# Altium PCB PCB1.PcbDoc
Units mm, origin at the board's own origin, x right, y up, seen from the top; angles counter-clockwise.
Board outline 40 x 40 mm, 2 copper layers (Top Layer, Bottom Layer); 11 components, 7 nets, 23 pads, 0 vias.
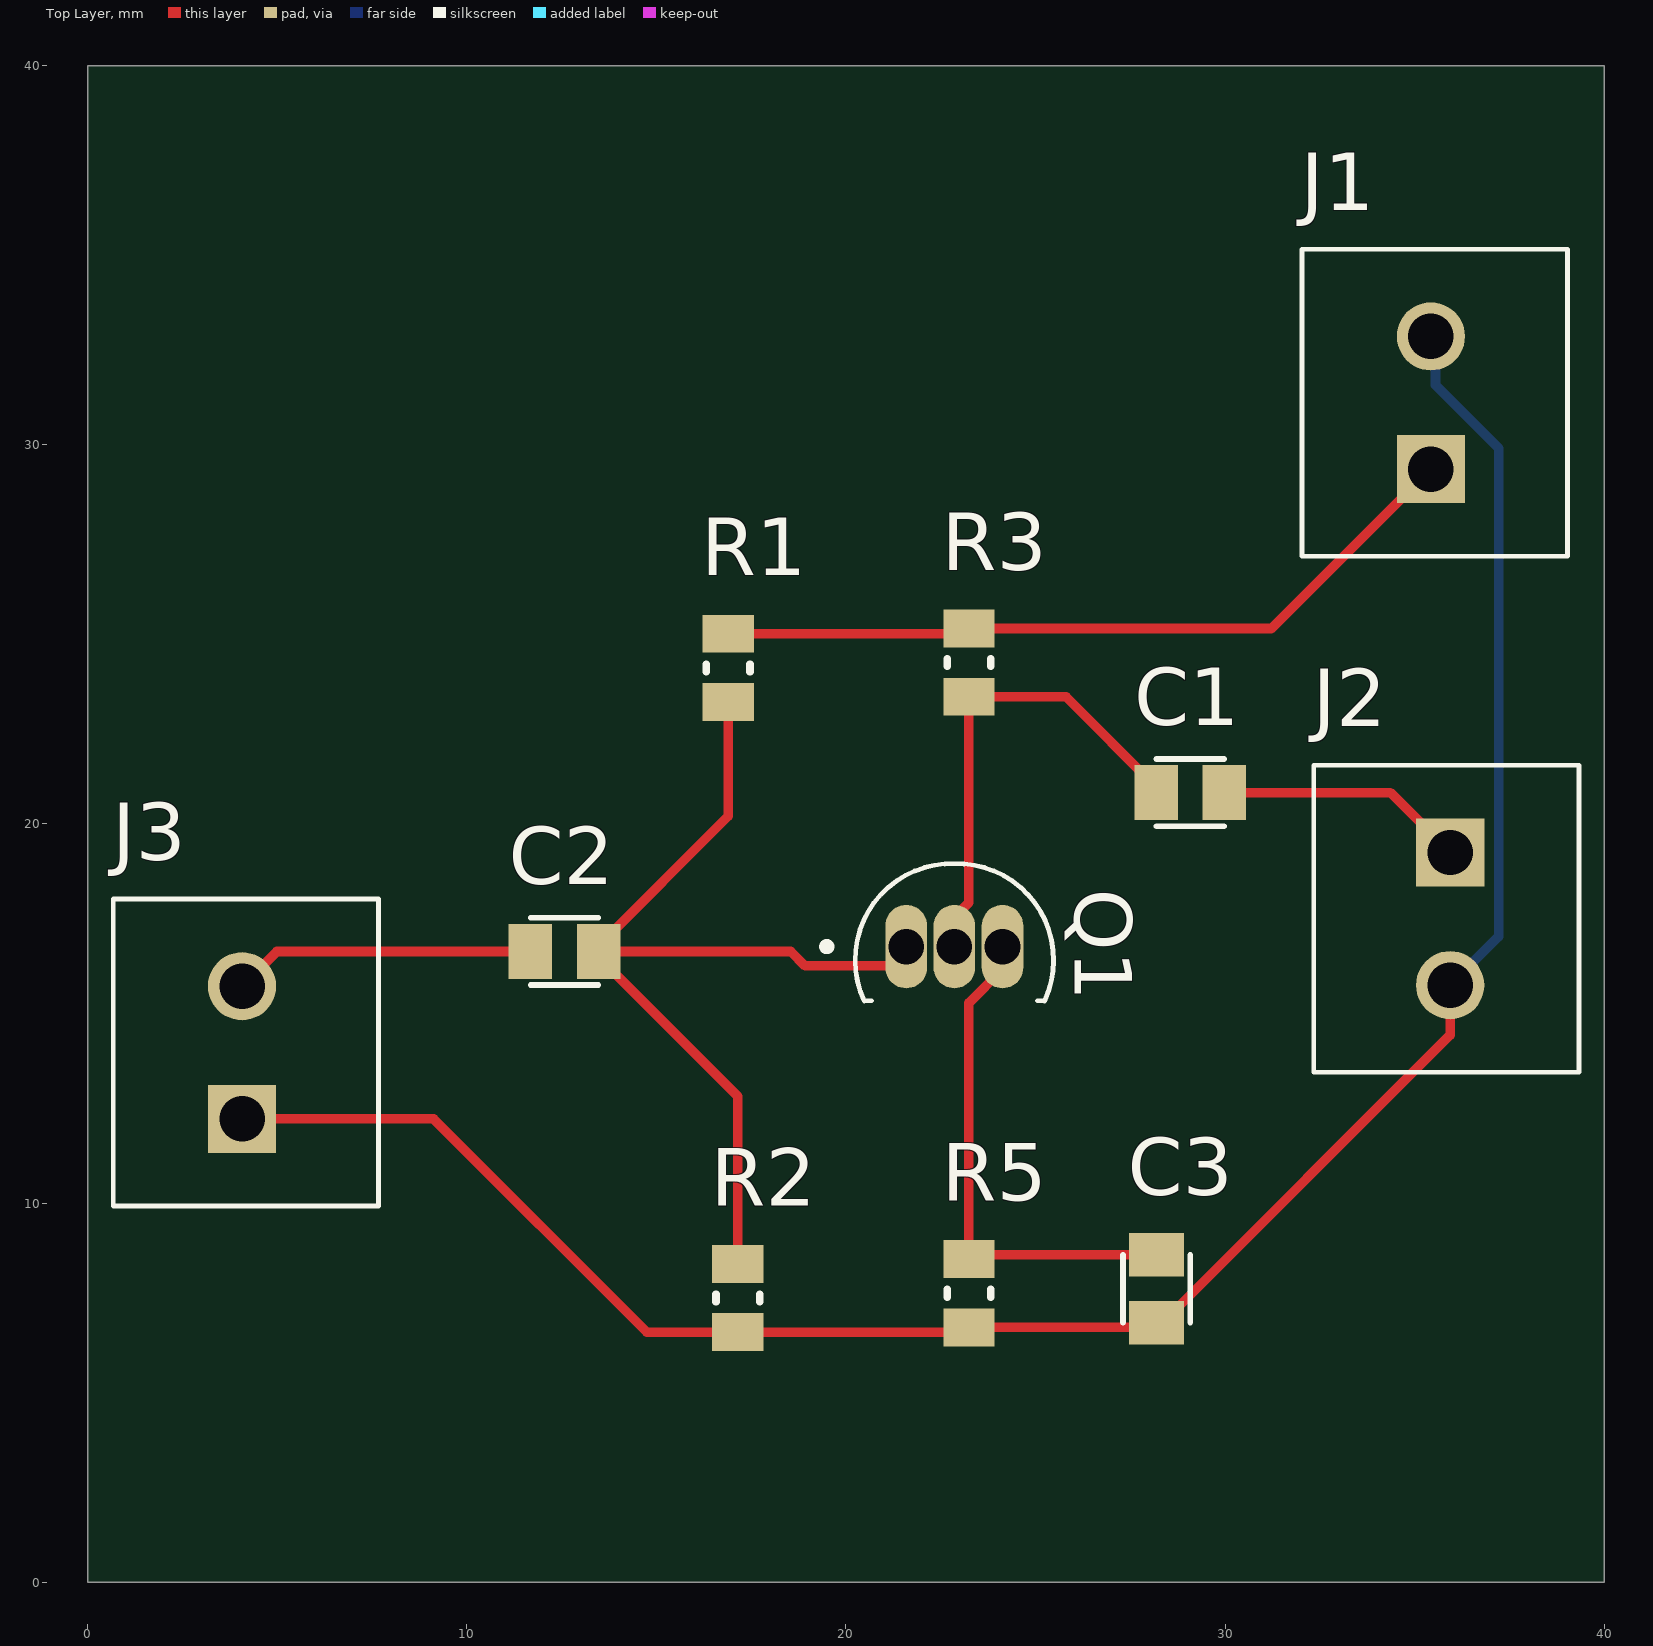
[diagram p0: Top Layer view]
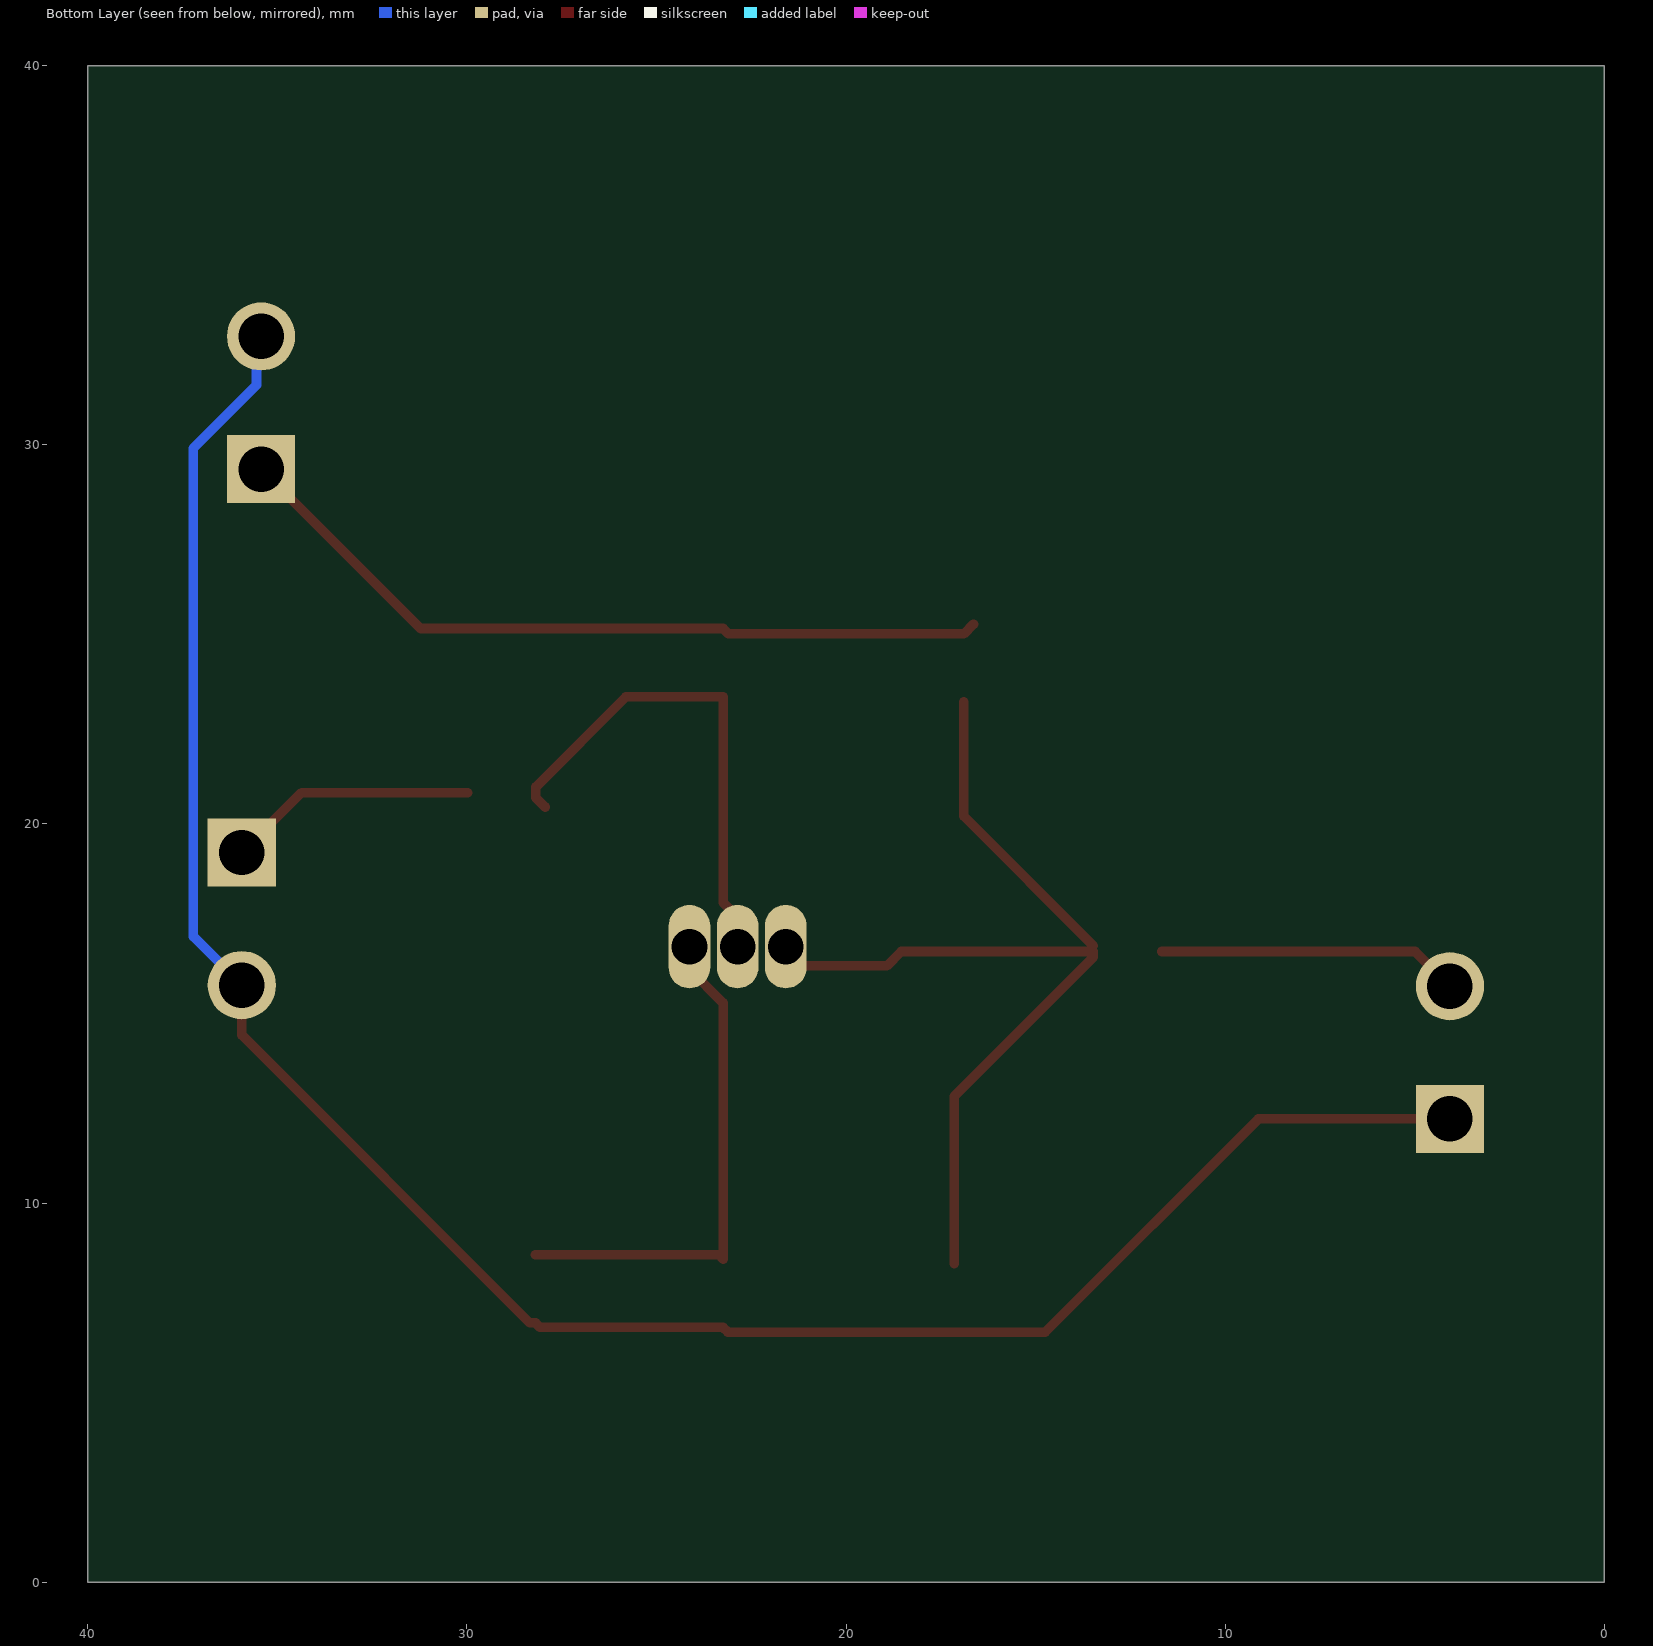
[diagram p1: Bottom Layer view, seen from below]
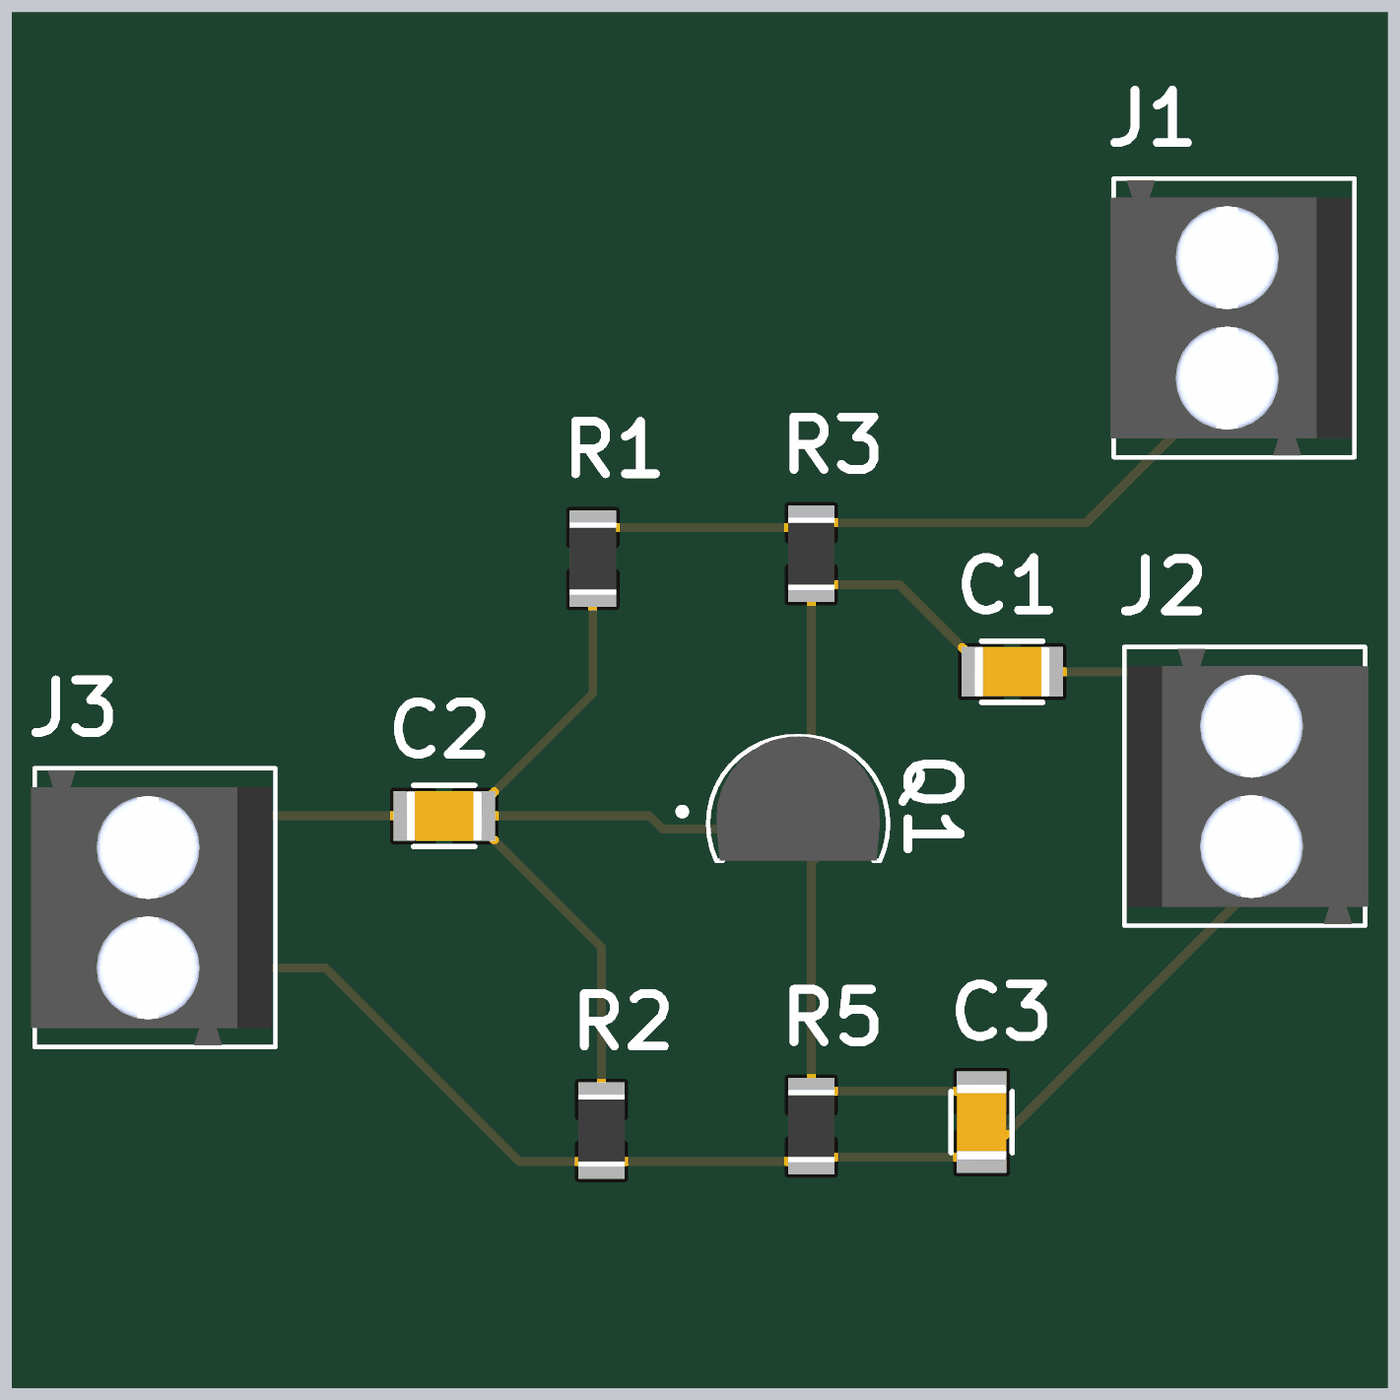
[diagram p2: 3D render of the assembled board from above, using the file's embedded part models]

## Layer stack, top to bottom
Top Solder: solder mask 0.0102, Solder Resist, Dk 3.5
Top Layer: signal copper 0.0356
Dielectric 1: dielectric 0.32, FR-4, Dk 4.8
Bottom Layer: signal copper 0.0356
Bottom Solder: solder mask 0.0102, Solder Resist, Dk 3.5

## Board outline
0,0 0,40 40,40 40,0

## Design rules (kind name [scope] priority, off if disabled: settings)
Clearance [All] p1: gap=0.254 ignorepadtopadclearanceinfootprint=FALSE
PolygonConnect [All] p1: connectstyle=Relief reliefconductorwidth=0.254 reliefentries=4 polygonreliefangle="90 Angle" airgapwidth=0.254
RoutingVias [All] p1: holewidth=0.711 width=1.27 viastyle="Through Hole" minholewidth=0.711 minwidth=1.27 maxholewidth=0.711 maxwidth=1.27
SolderMaskExpansion [All] p1: expansion=0.102 istentingtop=FALSE
SupplyNets "Schematic Supply Nets_1" [InNet('GND')] p1: voltage=0.000
SupplyNets "Schematic Supply Nets" [InNet('12V')] p2: voltage=0.000
Width [All] p1: maxlimit=0.254 minlimit=0.254 preferedwidth=0.254
30 further rules are at their usual default settings.

## Components (designator, comment, footprint, x,y, rotation, side; value= is the part's Value field where it differs from the comment)
C1 "C0805C105K9RACTU" C0805C105K9RACTU 29.083,20.828 r0 top value=1uF
C2 "C0805C105K9RACTU" C0805C105K9RACTU 12.573,16.637 r180 top value=1uF
C3 "C0805C105K9RACTU" C0805C105K9RACTU 28.194,7.736 r90 top value=1uF
J1 "OSTTE020104" OST_OSTTE020104 35.433,31.115 r90 top
J2 "OSTTE020104" OST_OSTTE020104 35.941,17.498 r270 top
J3 "OSTTE020104" OST_OSTTE020104 4.064,13.97 r90 top
Q1 "BC547BBU" "TO92127P476H533-3 - duplicate" 22.86,17.144 r0 top
R1 "RC0805FR-0721KL" RC0805FR-0721KL 16.891,24.119 r90 top value=21kR
R2 "RC0805FR-075K6L" RC0805FR-075K6L 17.145,7.493 r90 top value=5.6kR
R3 "RC0805FR-07330RL" RC0805FR-07330RL 23.241,24.257 r90 top value=330R
R5 "RC0805FR-0775RL" RC0805FR-0775RL 23.241,7.62 r270 top value=75R

## Footprints (in the part's own frame and the unit in brackets; to place one, negate y for a bottom-side part, rotate by r counter-clockwise, add the part's x,y. Pads: shape width x height; smd on the part's side, far side on the other; paste and mask are expansions set on the pad)
C0805C105K9RACTU [mm]
  rect 1.15x1.45 smd: 1(-0.9,0) 2(0.9,0)
  silkscreen extent -0.89,-0.89 0.89,0.89, body extent -1.1,-0.72 1.1,0.72, height 1.45
OST_OSTTE020104 [mm]
  rect 1.8x1.8 / inner round 1.8 / far side rect 1.8x1.8 hole 1.2: 1(-1.75,0)
  round 1.8 hole 1.2: 2(1.75,0)
  silkscreen extent -4.05,-3.6 4.05,3.4, body extent -4,-3.5 4,3.5, height 8.4
RC0805FR-075K6L [mm]
  rect 1x1.35 smd: 1(-0.9,0) 2(0.9,0)
  silkscreen extent -0.1,-0.58 0.1,0.58, body extent -1.05,-0.67 1.05,0.67, height 0.6
RC0805FR-0721KL [mm]
  rect 1x1.35 smd: 1(-0.9,0) 2(0.9,0)
  silkscreen extent -0.1,-0.58 0.1,0.58, body extent -1.05,-0.67 1.05,0.67, height 0.6
RC0805FR-0775RL [mm]
  rect 1x1.35 smd: 1(-0.9,0) 2(0.9,0)
  silkscreen extent -0.1,-0.58 0.1,0.58, body extent -1.05,-0.67 1.05,0.67, height 0.6
RC0805FR-07330RL [mm]
  rect 1x1.35 smd: 1(-0.9,0) 2(0.9,0)
  silkscreen extent -0.1,-0.58 0.1,0.58, body extent -1.05,-0.67 1.05,0.67, height 0.6
"TO92127P476H533-3 - duplicate" [mm]
  oval 1.1x2.2 hole 0.94: 1(-1.27,-0.38) 2(0,-0.38) 3(1.27,-0.38)
  silkscreen extent -3.47,-1.81 2.62,1.81, body extent -2.38,-1.81 2.38,1.81, height 5.33

## Part data
C1 C2 C3: "Ceramic Capacitor, Multilayer, Ceramic, 6.3V, 10% +Tol, 10% -Tol, X7R, 15% TC, 1uF, Surface Mount, 0805", Capacitor Type=Ceramic, Case/Package=0805, Manufacturer=KEMET, Max Operating Temperature=125°C, Min Operating Temperature=-55°C, Package Shape=Rectangular, Package Style=SMTMeter, Supplier Part Number=399-13161-1-ND, Temperature Characteristics Code=X7R, Tolerance  (fill in as +-)=10%, Voltage=6.3V, Category="Ceramic Capacitors", ComponentLink1Description="Data Sheet", ComponentLink1URL=https://datasheet.ciiva.com:443/pdfs/VipMasterIC/IC/KEME/KEME-S-A0008991654/KEME-S-A0008991654-1.pdf?src-supplier=IHS+Markit, Dielectric Material=Ceramic, Height=0.9mm, JESD-609 Code=e3, Length=2mm, Manufacturer Part Number=C0805C105K9RACTU, Mounting Technology="Surface Mount", Multilayer=Yes, Packaging="Tape and Reel", Pins=2, Pricing="1=0.13, 10=0.08, 100=0.0518, 1000=0.0363 (USD)", Reach SVHC Compliant=Yes, RoHS=Yes, RoHS Compliant=Yes, Stock=9671, Supplier=Digikey, Terminal Finish=Nickel, Termination=Wraparound, Tolerance (fill in as +-)=10%, Width=1.25mm
J1 J2 J3: "Barrier Strip Terminal Block, 10A, 1 Row(s), 1 Deck(s)", Current Rating=10A, Manufacturer="On-Shore Technology", Supplier Part Number=ED2740-ND, Voltage Rating=125V, Additional Feature="STANDARD: UL 94V-0, THERMOPLASTIC", Category="Terminal Blocks", ComponentLink1Description=https://datasheet.ciiva.com:443/pdfs/VipMasterIC/IC/ONST/ONST-S-A0002844285/ONST-S-A0002844285-1.pdf?src-supplier=IHS+Markit, ComponentLink1URL=https://datasheet.ciiva.com:443/pdfs/VipMasterIC/IC/ONST/ONST-S-A0002844285/ONST-S-A0002844285-1.pdf?src-supplier=IHS+Markit, ComponentLink2Description=http://www.on-shore.com/wp-content/uploads/2015/09/osttexx0164.pdf?src-supplier=Verical, ComponentLink2URL=http://www.on-shore.com/wp-content/uploads/2015/09/osttexx0164.pdf?src-supplier=Verical, ComponentLink3Description=http://www.on-shore.com/wp-content/uploads/2015/09/osttexx0164.pdf?src-supplier=Digikey, ComponentLink3URL=http://www.on-shore.com/wp-content/uploads/2015/09/osttexx0164.pdf?src-supplier=Digikey, ComponentLink4Description=http://www.on-shore.com/wp-content/uploads/2015/09/osttexx0164.pdf?src-supplier=Arrow+Electronics, ComponentLink4URL=http://www.on-shore.com/wp-content/uploads/2015/09/osttexx0164.pdf?src-supplier=Arrow+Electronics, Fastening Method=SCREW, Manufacturer Part Number=OSTTE020104, Mounting Technology=Board, Number of Decks=1, Number of Rows=1, Number of Ways=2, Pricing="1=0.48, 10=0.361, 25=0.3152, 50=0.2836, 100=0.2558, 250=0.225, 500=0.2061, 1000=0.19063, 5000=0.16559 (USD)", Reach SVHC Compliant=Yes, RoHS=Yes, RoHS Compliant=Yes, Safety Approval=UL,CUL, Stock=7767, Supplier=Digikey, Terminal and Terminal Block Type="BARRIER STRIP TERMINAL BLOCK", Wire/Cable Gauge=16AWG
Q1: "Small Signal Bipolar Transistor, 0.1A I(C), 45V V(BR)CEO, 1-Element, NPN, Silicon, TO-92", Collector-emitter Voltage-Max=45V, DC Current Gain-Min (hFE)=200, Frequency=300MHz, Manufacturer="ON Semiconductor / Fairchild", Max Collector Current=100mA, Max Operating Temperature=150°C, Package Body Material=Plastic, Package Shape=Round, Package Style=CYLINDRICALMeter, Power Dissipation-Max (Abs)=625mW, Supplier Part Number=BC547BBU-ND, Category=BJTs, ComponentLink1Description=https://datasheet.ciiva.com:443/pdfs/VipMasterIC/IC/ONSM/ONSM-S-A0003590719/ONSM-S-A0003590719-1.pdf?src-supplier=IHS+Markit, ComponentLink1URL=https://datasheet.ciiva.com:443/pdfs/VipMasterIC/IC/ONSM/ONSM-S-A0003590719/ONSM-S-A0003590719-1.pdf?src-supplier=IHS+Markit, ComponentLink2Description=https://datasheet.ciiva.com/4722/bc547-4722533.pdf?src-supplier=Mouser, ComponentLink2URL=https://datasheet.ciiva.com/4722/bc547-4722533.pdf?src-supplier=Mouser, ComponentLink3Description=https://datasheet.ciiva.com/11197/bc550-11197481.pdf?src-supplier=Avnet, ComponentLink3URL=https://datasheet.ciiva.com/11197/bc550-11197481.pdf?src-supplier=Avnet, ComponentLink4Description=https://datasheet.ciiva.com/46415/1868820-46415436.pdf?src-supplier=Element14, ComponentLink4URL=https://datasheet.ciiva.com/46415/1868820-46415436.pdf?src-supplier=Element14, ComponentLink5Description=https://datasheet.ciiva.com/978/bc546-978999.pdf?src-supplier=Digikey, ComponentLink5URL=https://datasheet.ciiva.com/978/bc546-978999.pdf?src-supplier=Digikey, ComponentLink6Description=https://datasheet.ciiva.com/17179/bc547-17179695.pdf?src-supplier=Future+Electronics, ComponentLink6URL=https://datasheet.ciiva.com/17179/bc547-17179695.pdf?src-supplier=Future+Electronics, JEDEC-95 Code=TO-92, JESD-30 Code=O-PBCY-T3, Manufacturer Part Number=BC547BBU, Number of Elements=1, Pins=3, Polarity/Channel Type=NPN, Pricing="1=0.27, 10=0.167, 100=0.1038, 500=0.07638, 1000=0.06748, 2000=0.05998, 5000=0.05184, 10000=0.04679, 50000=0.03795 (USD)", Qualification Status="Not Qualified", Reach SVHC Compliant=Yes, RoHS=Yes, RoHS Compliant=Yes, Stock=15923, Supplier=Digikey, Surface Mount=No, Terminal Form="Through Hole", Terminal Position=BOTTOM, Transistor Application=SWITCHING, Transistor Element Material=SILICON
R1: "Fixed Resistor, Metal Glaze/thick Film, 0.125W, 21000ohm, 150V, 1% +/-Tol, 100ppm/Cel, Surface Mount, 0805", Case/Package=0805, Manufacturer=Yageo, Max Operating Temperature=155°C, Min Operating Temperature=-55°C, Package Height=0.5mm, Package Length=2mm, Package Shape=Rectangular, Package Width=1.25mm, Power=125mW, Rated Temperature=70°C, Resistor Type="FIXED RESISTOR", Supplier Part Number=311-21.0KCRCT-ND, Temperature Coefficient (ppm/Cel)=100, Tolerance=1%, Working Voltage=150V, Additional Feature="LASER TRIMMABLE", Category="Chip SMD Resistors", ComponentLink1Description=https://datasheet.ciiva.com:443/pdfs/VipMasterIC/IC/YAGO/YAGO-S-A0008145938/YAGO-S-A0008145938-1.pdf?src-supplier=IHS+Markit, ComponentLink1URL=https://datasheet.ciiva.com:443/pdfs/VipMasterIC/IC/YAGO/YAGO-S-A0008145938/YAGO-S-A0008145938-1.pdf?src-supplier=IHS+Markit, ComponentLink2Description=https://datasheet.ciiva.com/2519/pyu-r-int-thick-7-2519837.pdf?src-supplier=Digikey, ComponentLink2URL=https://datasheet.ciiva.com/2519/pyu-r-int-thick-7-2519837.pdf?src-supplier=Digikey, ComponentLink3Description=https://datasheet.ciiva.com/2519/pyu-r-int-thick-7-2519838.pdf?src-supplier=Digikey, ComponentLink3URL=https://datasheet.ciiva.com/2519/pyu-r-int-thick-7-2519838.pdf?src-supplier=Digikey, ComponentLink4Description=https://datasheet.ciiva.com/2519/pyu-r-int-thick-7-2519839.pdf?src-supplier=Digikey, ComponentLink4URL=https://datasheet.ciiva.com/2519/pyu-r-int-thick-7-2519839.pdf?src-supplier=Digikey, ComponentLink5Description=https://datasheet.ciiva.com/12558/rc0805-257173-12558585.pdf?src-supplier=Mouser, ComponentLink5URL=https://datasheet.ciiva.com/12558/rc0805-257173-12558585.pdf?src-supplier=Mouser, ComponentLink6Description=https://datasheet.ciiva.com/16742/rc0805-16742250.pdf?src-supplier=Future+Electronics, ComponentLink6URL=https://datasheet.ciiva.com/16742/rc0805-16742250.pdf?src-supplier=Future+Electronics, Construction=Chip, JESD-609 Code=e3, Manufacturer Part Number=RC0805FR-0721KL, Mounting Technology="Surface Mount", Packaging="Tape and Reel", Pins=2, Pricing="1=0.1, 10=0.011, 100=0.0092 (USD)", Reach SVHC Compliant=Yes, RoHS=Yes, RoHS Compliant=Yes, Stock=156, Supplier=Digikey, Technology="METAL GLAZE/THICK FILM", Terminal Finish=Nickel, Termination=Wraparound
R2: "Fixed Resistor, Metal Glaze/thick Film, 0.125W, 5600ohm, 150V, 1% +/-Tol, 100ppm/Cel, Surface Mount, 0805", Case/Package=0805, Manufacturer=Yageo, Max Operating Temperature=155°C, Min Operating Temperature=-55°C, Package Height=0.5mm, Package Length=2mm, Package Shape=Rectangular, Package Width=1.25mm, Power=125mW, Rated Temperature=70°C, Resistor Type="FIXED RESISTOR", Supplier Part Number=311-5.60KCRCT-ND, Temperature Coefficient (ppm/Cel)=100, Tolerance=1%, Working Voltage=150V, Additional Feature="LASER TRIMMABLE", Category="Chip SMD Resistors", ComponentLink1Description=https://datasheet.ciiva.com:443/pdfs/VipMasterIC/IC/YAGO/YAGO-S-A0008145938/YAGO-S-A0008145938-1.pdf?src-supplier=IHS+Markit, ComponentLink1URL=https://datasheet.ciiva.com:443/pdfs/VipMasterIC/IC/YAGO/YAGO-S-A0008145938/YAGO-S-A0008145938-1.pdf?src-supplier=IHS+Markit, ComponentLink2Description=https://datasheet.ciiva.com/2519/pyu-r-int-thick-7-2519845.pdf?src-supplier=Digikey, ComponentLink2URL=https://datasheet.ciiva.com/2519/pyu-r-int-thick-7-2519845.pdf?src-supplier=Digikey, ComponentLink3Description=https://datasheet.ciiva.com/2519/pyu-r-int-thick-7-2519843.pdf?src-supplier=Digikey, ComponentLink3URL=https://datasheet.ciiva.com/2519/pyu-r-int-thick-7-2519843.pdf?src-supplier=Digikey, ComponentLink4Description=https://datasheet.ciiva.com/7941/444164-7941819.pdf?src-supplier=Element14, ComponentLink4URL=https://datasheet.ciiva.com/7941/444164-7941819.pdf?src-supplier=Element14, ComponentLink5Description=https://datasheet.ciiva.com/7941/444164-7941820.pdf?src-supplier=Element14, ComponentLink5URL=https://datasheet.ciiva.com/7941/444164-7941820.pdf?src-supplier=Element14, ComponentLink6Description=https://datasheet.ciiva.com/2519/pyu-r-int-thick-7-2519844.pdf?src-supplier=Digikey, ComponentLink6URL=https://datasheet.ciiva.com/2519/pyu-r-int-thick-7-2519844.pdf?src-supplier=Digikey, Construction=Chip, JESD-609 Code=e3, Manufacturer Part Number=RC0805FR-075K6L, Mounting Technology="Surface Mount", Packaging="Tape and Reel", Pins=2, Pricing="1=0.1, 10=0.014, 100=0.0112, 1000=0.00918, 2500=0.00686 (USD)", Reach SVHC Compliant=Yes, RoHS=Yes, RoHS Compliant=Yes, Stock=43155, Supplier=Digikey, Technology="METAL GLAZE/THICK FILM", Terminal Finish=Nickel, Termination=Wraparound
R3: "Fixed Resistor, Metal Glaze/thick Film, 0.125W, 330ohm, 150V, 1% +/-Tol, 100ppm/Cel, Surface Mount, 0805", Case/Package=0805, Manufacturer=Yageo, Max Operating Temperature=155°C, Min Operating Temperature=-55°C, Package Height=0.5mm, Package Length=2mm, Package Shape=Rectangular, Package Width=1.25mm, Power=125mW, Rated Temperature=70°C, Resistor Type="FIXED RESISTOR", Supplier Part Number=311-330CRCT-ND, Temperature Coefficient (ppm/Cel)=100, Tolerance=1%, Working Voltage=150V, Additional Feature="LASER TRIMMABLE", Category="Chip SMD Resistors", ComponentLink1Description=https://datasheet.ciiva.com:443/pdfs/VipMasterIC/IC/YAGO/YAGO-S-A0008145938/YAGO-S-A0008145938-1.pdf?src-supplier=IHS+Markit, ComponentLink1URL=https://datasheet.ciiva.com:443/pdfs/VipMasterIC/IC/YAGO/YAGO-S-A0008145938/YAGO-S-A0008145938-1.pdf?src-supplier=IHS+Markit, ComponentLink2Description=https://datasheet.ciiva.com/12667/rc0805-12667925.pdf?src-supplier=Mouser, ComponentLink2URL=https://datasheet.ciiva.com/12667/rc0805-12667925.pdf?src-supplier=Mouser, ComponentLink3Description=https://datasheet.ciiva.com/7941/444164-7941768.pdf?src-supplier=Element14, ComponentLink3URL=https://datasheet.ciiva.com/7941/444164-7941768.pdf?src-supplier=Element14, ComponentLink4Description=https://datasheet.ciiva.com/7941/444164-7941769.pdf?src-supplier=Element14, ComponentLink4URL=https://datasheet.ciiva.com/7941/444164-7941769.pdf?src-supplier=Element14, ComponentLink5Description=https://datasheet.ciiva.com/2457/pyu-r-int-thick-7-2457014.pdf?src-supplier=Digikey, ComponentLink5URL=https://datasheet.ciiva.com/2457/pyu-r-int-thick-7-2457014.pdf?src-supplier=Digikey, ComponentLink6Description=https://datasheet.ciiva.com/2457/pyu-r-int-thick-7-2457015.pdf?src-supplier=Digikey, ComponentLink6URL=https://datasheet.ciiva.com/2457/pyu-r-int-thick-7-2457015.pdf?src-supplier=Digikey, ComponentLink7Description=https://datasheet.ciiva.com/2457/pyu-r-int-thick-7-2457016.pdf?src-supplier=Digikey, ComponentLink7URL=https://datasheet.ciiva.com/2457/pyu-r-int-thick-7-2457016.pdf?src-supplier=Digikey, ComponentLink8Description=https://datasheet.ciiva.com/16740/rc0805-16740975.pdf?src-supplier=Future+Electronics, ComponentLink8URL=https://datasheet.ciiva.com/16740/rc0805-16740975.pdf?src-supplier=Future+Electronics, Construction=Chip, JESD-609 Code=e3, Manufacturer Part Number=RC0805FR-07330RL, Mounting Technology="Surface Mount", Packaging="Tape and Reel", Pins=2, Pricing="1=0.1, 10=0.011, 100=0.0102, 1000=0.00816, 2500=0.00686 (USD)", Reach SVHC Compliant=Yes, RoHS=Yes, RoHS Compliant=Yes, Stock=211766, Supplier=Digikey, Technology="METAL GLAZE/THICK FILM", Terminal Finish=Nickel, Termination=Wraparound
R5: "Fixed Resistor, Metal Glaze/thick Film, 0.125W, 75ohm, 150V, 1% +/-Tol, 100ppm/Cel, Surface Mount, 0805", Case/Package=0805, Manufacturer=Yageo, Max Operating Temperature=155°C, Min Operating Temperature=-55°C, Package Height=0.5mm, Package Length=2mm, Package Shape=Rectangular, Package Width=1.25mm, Power=125mW, Rated Temperature=70°C, Resistor Type="FIXED RESISTOR", Supplier Part Number=311-75.0CRCT-ND, Temperature Coefficient (ppm/Cel)=100, Tolerance=1%, Working Voltage=150V, Additional Feature="LASER TRIMMABLE", Category="Chip SMD Resistors", ComponentLink1Description=https://datasheet.ciiva.com:443/pdfs/VipMasterIC/IC/YAGO/YAGO-S-A0008145938/YAGO-S-A0008145938-1.pdf?src-supplier=IHS+Markit, ComponentLink1URL=https://datasheet.ciiva.com:443/pdfs/VipMasterIC/IC/YAGO/YAGO-S-A0008145938/YAGO-S-A0008145938-1.pdf?src-supplier=IHS+Markit, ComponentLink2Description=https://datasheet.ciiva.com/2519/pyu-r-int-thick-7-2519706.pdf?src-supplier=Digikey, ComponentLink2URL=https://datasheet.ciiva.com/2519/pyu-r-int-thick-7-2519706.pdf?src-supplier=Digikey, ComponentLink3Description=https://datasheet.ciiva.com/2519/pyu-r-int-thick-7-2519707.pdf?src-supplier=Digikey, ComponentLink3URL=https://datasheet.ciiva.com/2519/pyu-r-int-thick-7-2519707.pdf?src-supplier=Digikey, Construction=Chip, JESD-609 Code=e3, Manufacturer Part Number=RC0805FR-0775RL, Mounting Technology="Surface Mount", Packaging="Tape and Reel", Pins=2, Pricing="1=0.1, 10=0.012, 100=0.0102, 1000=0.00816, 2500=0.00686 (USD)", Reach SVHC Compliant=Yes, RoHS=Yes, RoHS Compliant=Yes, Stock=349214, Supplier=Digikey, Technology="METAL GLAZE/THICK FILM", Terminal Finish=Nickel, Termination=Wraparound

## Nets (pads, with @x,y where several pads share a name; then routed paths per layer and width w, separated by ;. In a path a pad name is that pad's centre, name@x,y a point inside that pad or via, vN(x,y) a via of type N, cw(c..) or ccw(c..) an arc to the next point about the centre after c; other vN are vias at no path point)
12V: J1.1 R1.2 R3.2 | length 20.7
  Top Layer w0.254: R1.2@16.637,25.273 R1.2 23.103,25.019 R3.2 31.225,25.157 J1.1
GND: C3.1 J1.2 J2.2 J3.1 R2.1 R5.2 | length 57.3
  Top Layer w0.254: J3.1 9.116,12.22 14.743,6.593 R2.1 23.114,6.593 R5.2 28.078,6.72 C3.1 28.344,6.836 35.941,14.433 35.941,15.621 36.068,15.748 J2.2
  Bottom Layer w0.254: J1.2 35.553,32.745 35.553,31.584 37.222,29.915 37.222,17.029 J2.2
input: C2.2 J3.2 | length 8
  Top Layer w0.254: J3.2 4.981,16.637 C2.2
NetC1_1: C1.1 Q1.2 R3.1 | length 13.3
  Top Layer w0.254: Q1.2 22.86,17.543 23.241,17.924 R3.1 25.804,23.357 28.183,20.978 C1.1 28.183,20.69 C1.1@27.94,20.447
NetC1_2: C1.2 J2.1 | length 6.6
  Top Layer w0.254: C1.2 34.361,20.828 J2.1
NetC2_1: C2.1 Q1.1 R1.1 R2.2 | length 26.2
  Top Layer w0.254: C2.1@13.473,16.787 16.891,20.205 R1.1 ; R2.2 17.145,12.815 13.473,16.487 C2.1 18.542,16.637 18.923,16.256 21.199,16.256 21.59,16.647 Q1.1
NetC3_2: C3.2 Q1.3 R5.1 | length 13.6
  Top Layer w0.254: Q1.3 24.13,16.167 23.241,15.278 R5.1 23.357,8.636 C3.2